# Altium PCB Robo_Sumo.PcbDoc
Units mm, origin at the board's own origin, x right, y up, seen from the top; angles counter-clockwise.
Board outline 99.9 x 99.96 mm, 2 copper layers (Top Layer, Bottom Layer); 38 components, 45 nets, 138 pads, 33 vias.
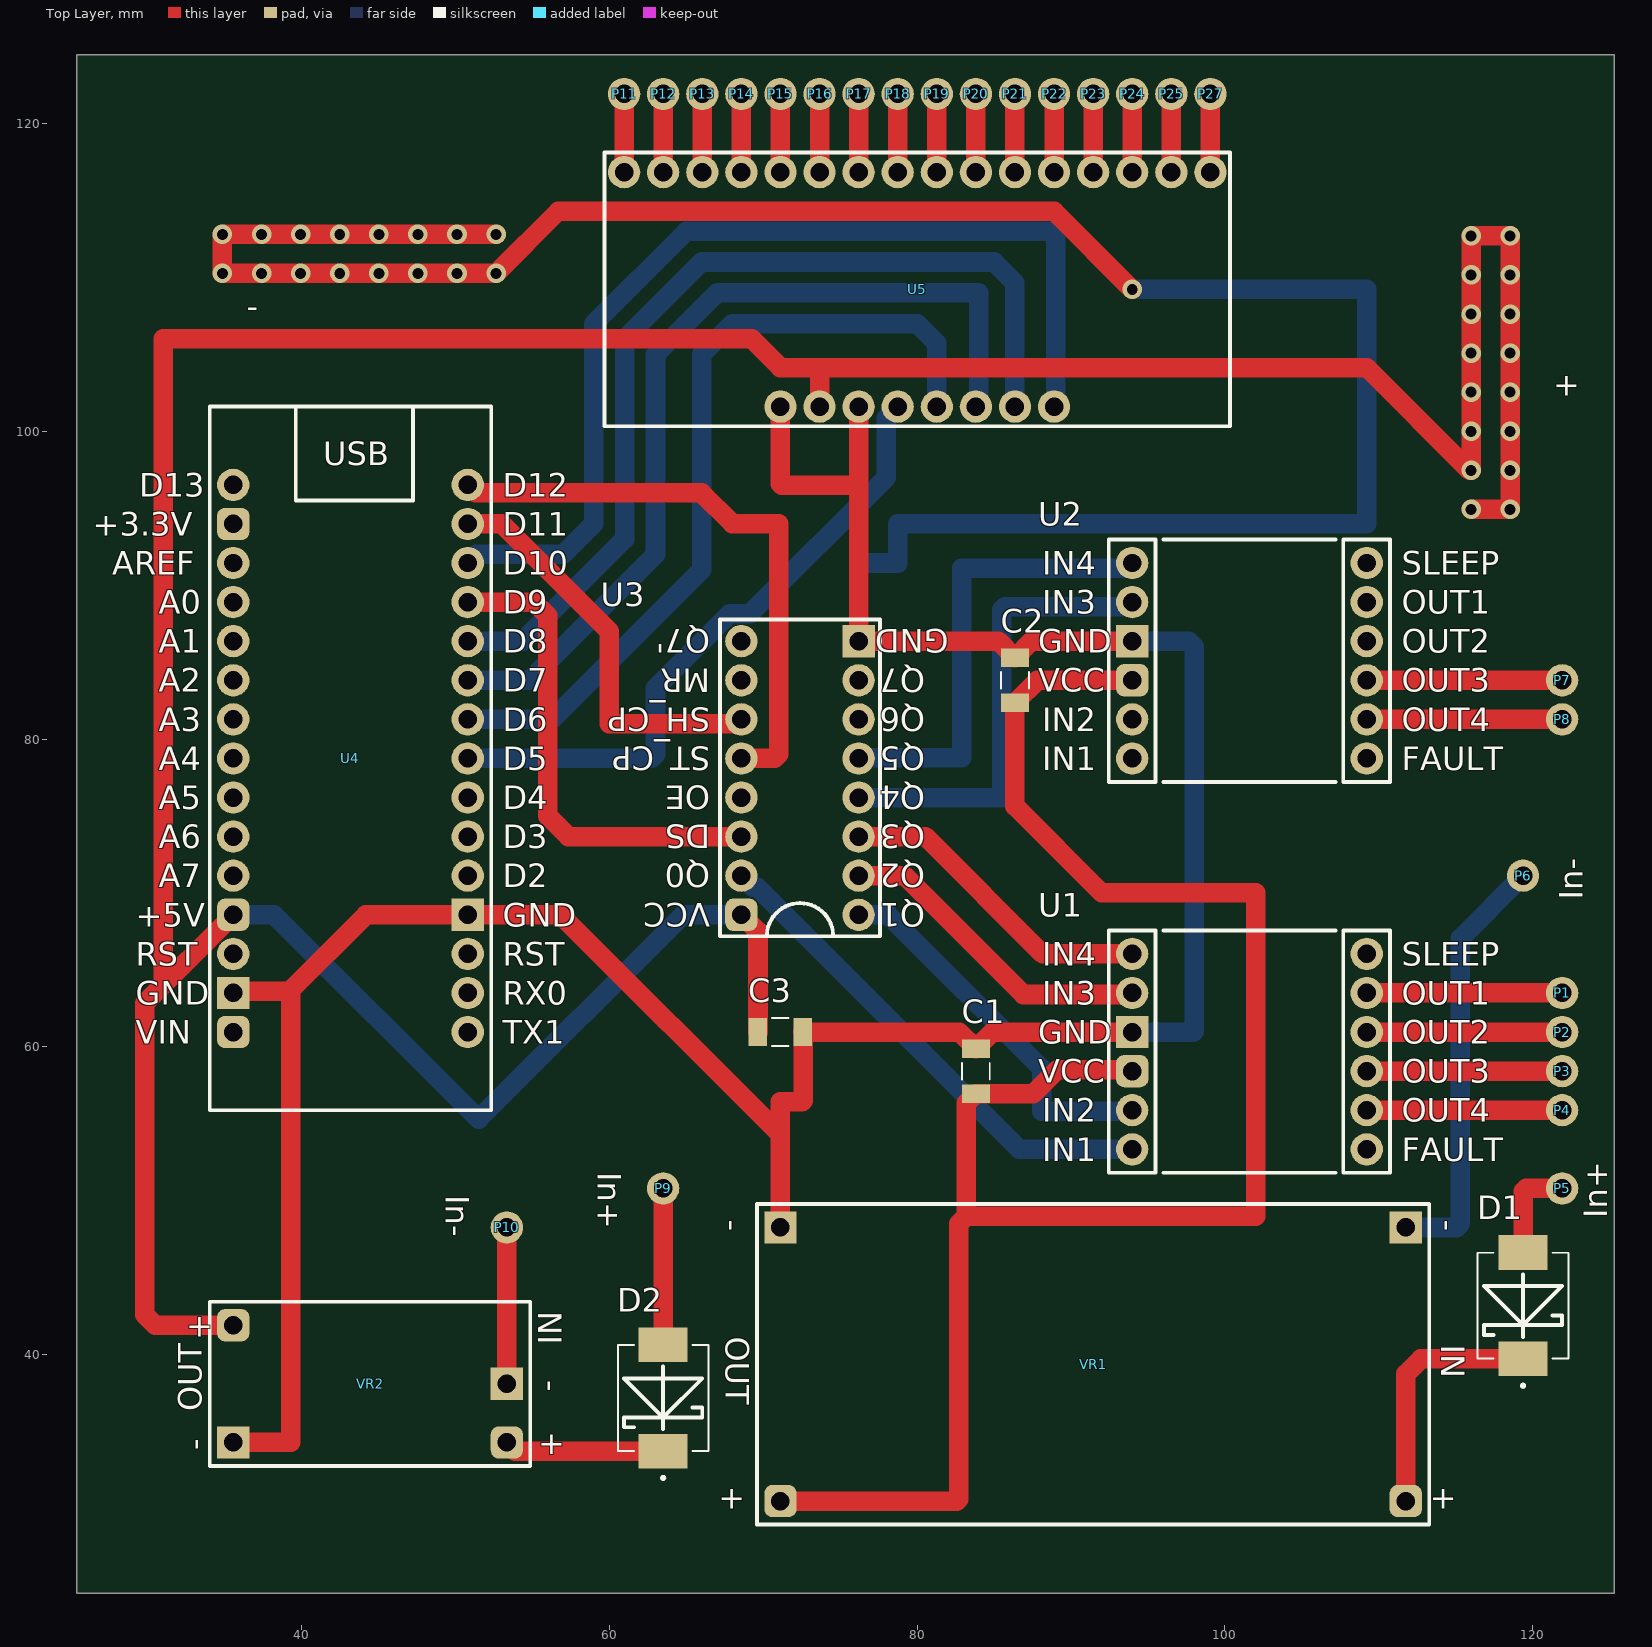
[diagram p0: Top Layer view]
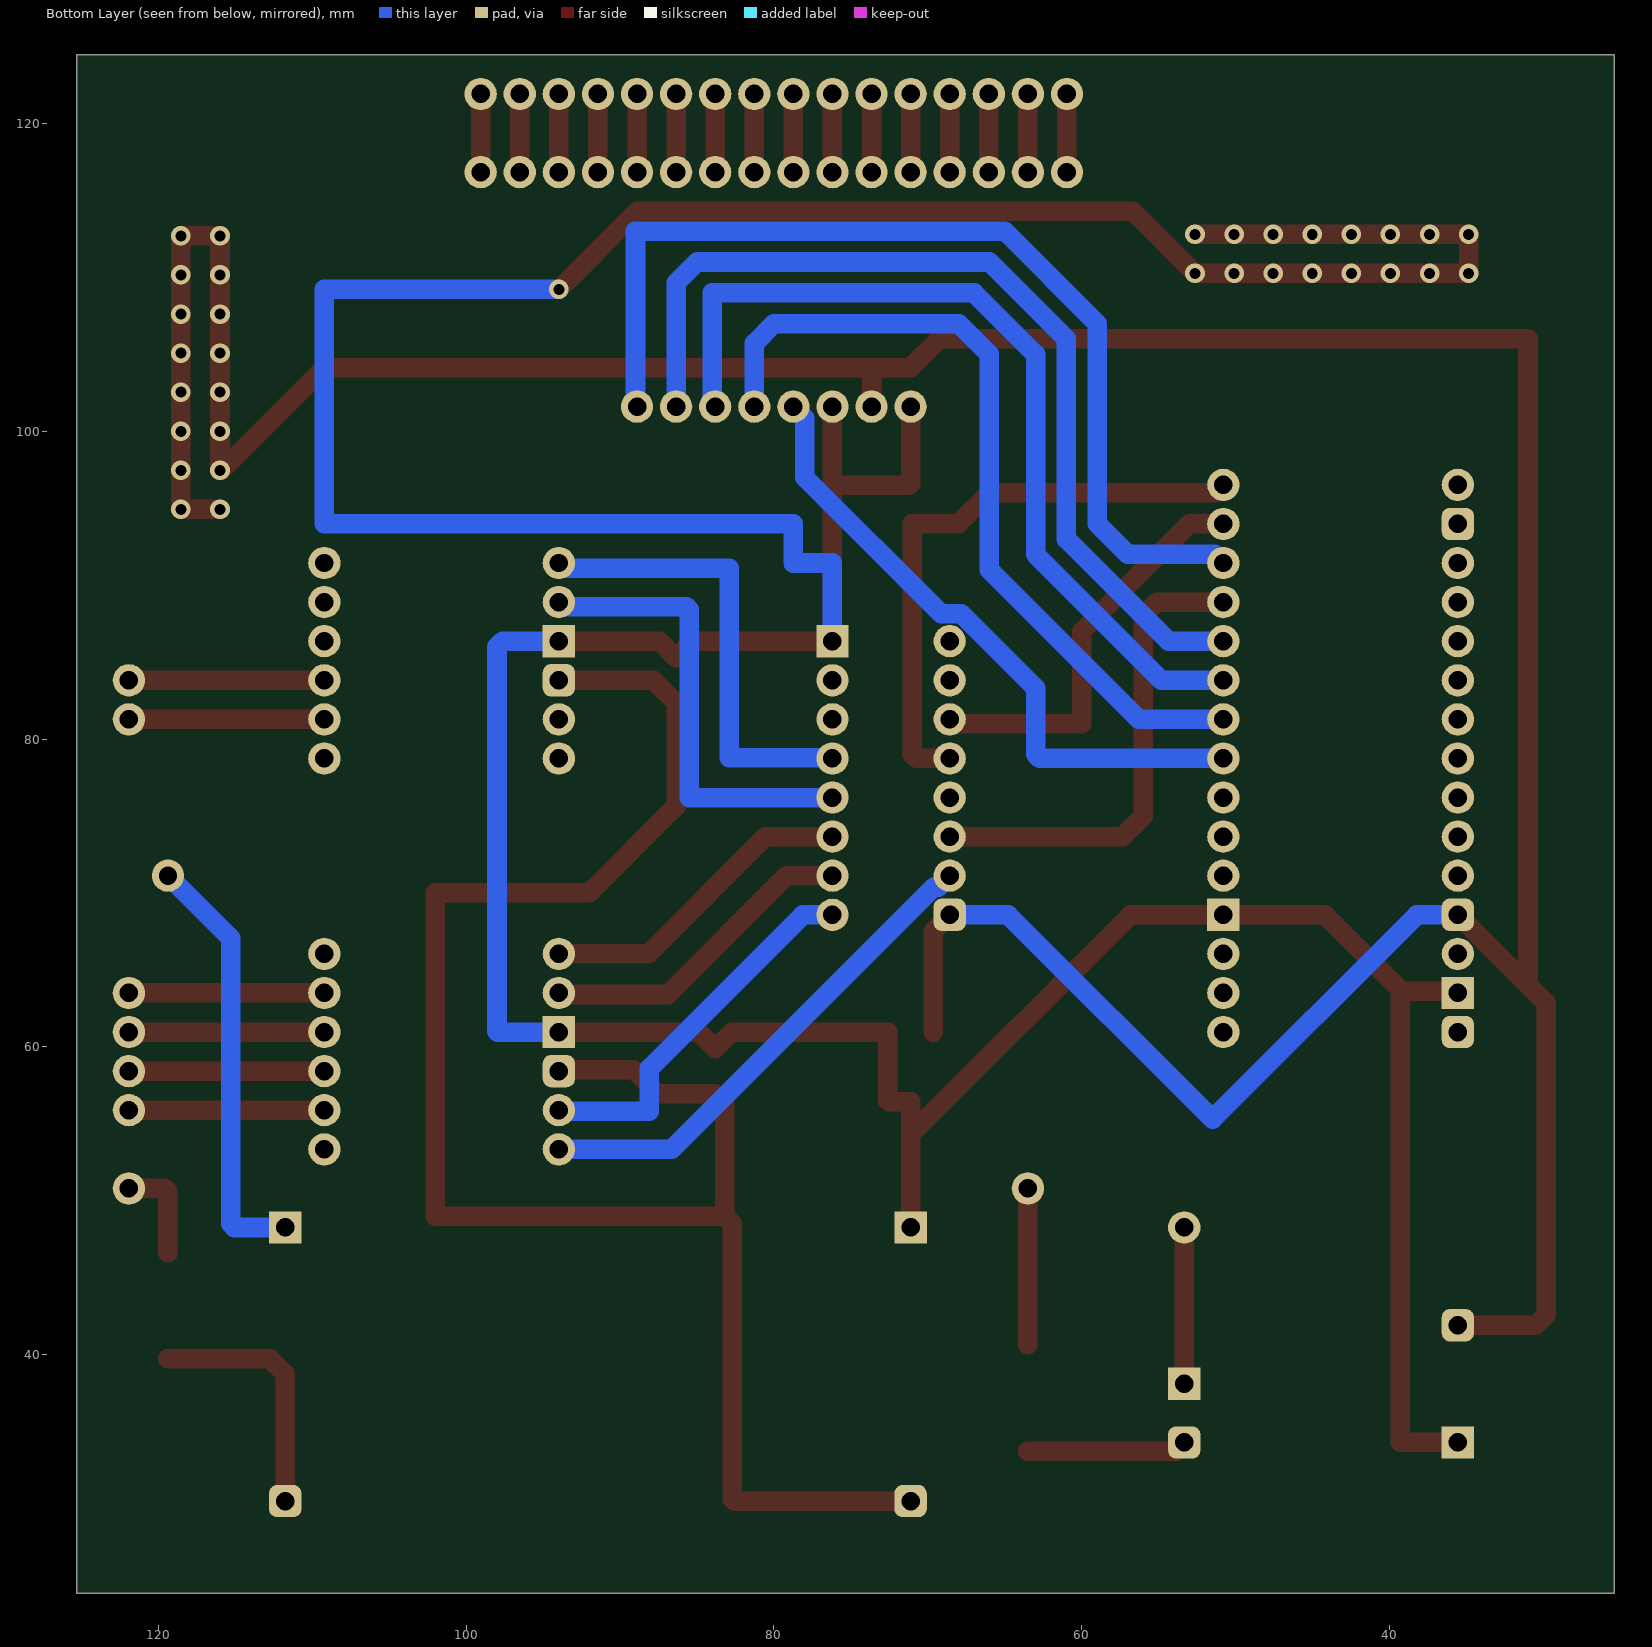
[diagram p1: Bottom Layer view, seen from below]

## Layer stack, top to bottom
Top Solder: solder mask 0.0102, Solder Resist, Dk 3.5
Top Layer: signal copper 0.0356
Dielectric 1: dielectric 0.32, FR-4, Dk 4.8
Bottom Layer: signal copper 0.0356
Bottom Solder: solder mask 0.0102, Solder Resist, Dk 3.5

## Board outline
25.4,24.5 125.3,24.5 125.3,124.46 25.4,124.46

## Design rules (kind name [scope] priority, off if disabled: settings)
AssemblyTestPointUsage [All] p1: isadvanced=TRUE
AssemblyTestpoint [All] p1: isadvanced=TRUE testpointundercomponent=TRUE minsize=1.016 maxsize=2.54 preferedsize=1.524 minholesize=0 maxholesize=1.016 preferedholesize=0.813 testpointgrid=0.025 usegrid=TRUE gridtolerance=0 allowsidetop=TRUE allowsidebottom=TRUE
Clearance Clearance_1 [OnMid vs OnMid] p1: gap=0.1 ignorepadtopadclearanceinfootprint=FALSE sourcerule=49 cellrowname=All cellrowtype=0 cellcolname=All cellcoltype=0 innerlayers=TRUE
Clearance Clearance_2 [(ExistsOnLayer('Top Layer') Or ExistsOnLayer('Bottom Layer')) vs (ExistsOnLayer('Top Layer') Or ExistsOnLayer('Bottom Layer'))] p2: gap=0.1 ignorepadtopadclearanceinfootprint=FALSE sourcerule=49 cellrowname=All cellrowtype=0 cellcolname=All cellcoltype=0 outerlayers=TRUE
Clearance [All] p3: gap=0.254 ignorepadtopadclearanceinfootprint=FALSE ismatrix=TRUE
ComponentClearance [All] p1: isadvanced=TRUE gap=0.254 collisioncheckmode=3 verticalgap=0.254 showdistances=FALSE
FabricationTestPointUsage [All] p1: isadvanced=TRUE valid=0 allowmultiple=FALSE
FabricationTestpoint [All] p1: isadvanced=TRUE side=3 testpointundercomponent=TRUE minsize=1.016 maxsize=2.54 preferedsize=1.524 minholesize=0 maxholesize=1.016 preferedholesize=0.813 testpointgrid=0.025 allowsidetop=TRUE allowsidebottom=TRUE usegrid=TRUE gridtolerance=0
FanoutControl Fanout_BGA [IsBGA] p1: isadvanced=TRUE bgadir=Out bgaviamode=Centered fanoutstyle=Auto fanoutdirection=Alternating viagrid=0.025 // Fanout_BGA (Default Rule)
FanoutControl Fanout_LCC [IsLCC] p2: isadvanced=TRUE bgadir=Out bgaviamode=Centered fanoutstyle=Auto fanoutdirection=Alternating viagrid=0.025 // Fanout_LCC (Default Rule)
FanoutControl Fanout_SOIC [IsSOIC] p3: isadvanced=TRUE bgadir=Out bgaviamode=Centered fanoutstyle=Auto fanoutdirection=Alternating viagrid=0.025 // Fanout_SOIC (Default Rule)
FanoutControl Fanout_Small [(CompPinCount < 5)] p4: isadvanced=TRUE bgadir=Out bgaviamode=Centered fanoutstyle=Auto fanoutdirection=OutThenIn viagrid=0.025 // Fanout_Small (Default Rule)
FanoutControl Fanout_Default [All] p5: isadvanced=TRUE bgadir=Out bgaviamode=Centered fanoutstyle=Auto fanoutdirection=Alternating viagrid=0.025 // Fanout_Default (Default Rule)
Height [All] p1: isadvanced=TRUE minheight=0 maxheight=25.4 prefheight=12.7
HoleSize [All] p1: isadvanced=TRUE absolutevalues=TRUE maxlimit=2.54 minlimit=0.025 maxpercent=80.000 minpercent=20.000
HoleToHoleClearance [All] p1: isadvanced=TRUE gap=0.254 allowstackedmicrovias=TRUE
LayerPairs [All] p1: isadvanced=TRUE enforce=TRUE
MinimumSolderMaskSliver [All] p1: isadvanced=TRUE minsoldermaskwidth=0.254
NetAntennae [All] p1: isadvanced=TRUE netantennaetolerance=0
PasteMaskExpansion [All] p1: isadvanced=TRUE expansion=0
PlaneClearance [All] p1: isadvanced=TRUE clearance=0.508
PlaneConnect [All] p1: isadvanced=TRUE planeconnectstyle=Relief reliefexpansion=0.508 reliefentries=4 reliefconductorwidth=0.254 reliefairgap=0.254
PolygonConnect [All] p1: connectstyle=Relief reliefconductorwidth=0.254 reliefentries=4 polygonreliefangle="90 Angle" airgapwidth=0.254
RoutingCorners [All] p1: isadvanced=TRUE cornerstyle=45-Degree minsetback=2.54 maxsetback=2.54
RoutingPriority [All] p1: isadvanced=TRUE routingpriority=0
RoutingVias [All] p1: holewidth=0.711 width=1.27 viastyle="Through Hole" minholewidth=0.711 minwidth=1.27 maxholewidth=0.711 maxwidth=1.27
ShortCircuit [All] p1: isadvanced=TRUE allowed=FALSE
SilkToSilkClearance [All] p1: isadvanced=TRUE silktosilkclearance=0.254
SilkToSolderMaskClearance [IsPad] p1: isadvanced=TRUE minsilkscreentomaskgap=0.254 clearancetoexposedcopper=TRUE
SolderMaskExpansion [All] p1: isadvanced=TRUE expansion=0.102 istentingtop=FALSE
SupplyNets "Schematic Supply Nets_11" [InNet('ST_CP')] p1: isadvanced=TRUE voltage=0.000
SupplyNets "Schematic Supply Nets_10" [InNet('Q4')] p2: isadvanced=TRUE voltage=0.000
SupplyNets "Schematic Supply Nets_9" [InNet('Q2')] p3: isadvanced=TRUE voltage=0.000
SupplyNets "Schematic Supply Nets_8" [InNet('+5')] p4: isadvanced=TRUE voltage=0.000
SupplyNets "Schematic Supply Nets_7" [InNet('+3V')] p5: isadvanced=TRUE voltage=0.000
SupplyNets "Schematic Supply Nets_6" [InNet('Q1')] p6: isadvanced=TRUE voltage=0.000
SupplyNets "Schematic Supply Nets_5" [InNet('Q3')] p7: isadvanced=TRUE voltage=0.000
SupplyNets "Schematic Supply Nets_4" [InNet('GND')] p8: isadvanced=TRUE voltage=0.000
SupplyNets "Schematic Supply Nets_3" [InNet('DS')] p9: isadvanced=TRUE voltage=0.000
SupplyNets "Schematic Supply Nets_2" [InNet('Q5')] p10: isadvanced=TRUE voltage=0.000
SupplyNets "Schematic Supply Nets_1" [InNet('SH_CP')] p11: isadvanced=TRUE voltage=0.000
SupplyNets "Schematic Supply Nets" [InNet('Q0')] p12: isadvanced=TRUE voltage=0.000
UnRoutedNet [All] p1: isadvanced=TRUE
UnpouredPolygon [All] p1: isadvanced=TRUE
Width MaxMinWidth_1 [All] p1: isadvanced=TRUE maxlimit=1.27 minlimit=0.254 preferedwidth=1.27 minimp=50.000000 maximp=50.000000 favimp=50.000000
Width [All] p2 off: maxlimit=0.254 minlimit=0.254 preferedwidth=0.254
4 further rules are at their usual default settings.

## Components (designator, comment, footprint, x,y, rotation, side; value= is the part's Value field where it differs from the comment)
C1 "100nF" CAPC3216X180N 83.82,58.42 r270 top
C2 "100nF" CAPC3216X180N 86.36,83.82 r90 top
C3 "100nF" CAPC3216X180N 71.12,60.96 r180 top
D1 "SS34" DIOM7959X265N 119.38,43.18 r90 top
D2 "SS34" DIOM7959X265N 63.5,37.185 r90 top
P1 "Q0" PCB_Pin_1 121.92,63.5 r0 top
P2 "Q1" PCB_Pin_1 121.92,60.96 r0 top
P3 "Q2" PCB_Pin_1 121.92,58.42 r0 top
P4 "Q3" PCB_Pin_1 121.92,55.88 r0 top
P5 "+16V" PCB_Pin_1 121.92,50.8 r0 top
P6 "GND" PCB_Pin_1 119.38,71.12 r0 top
P7 "Q4" PCB_Pin_1 121.92,83.82 r0 top
P8 "Q5" PCB_Pin_1 121.92,81.28 r0 top
P9 "+4V" PCB_Pin_1 63.5,50.8 r0 top
P10 "GND" PCB_Pin_1 53.34,48.26 r0 top
P11 "" PCB_Pin_1 60.96,121.92 r0 top
P12 "" PCB_Pin_1 63.5,121.92 r0 top
P13 "" PCB_Pin_1 66.04,121.92 r0 top
P14 "" PCB_Pin_1 68.58,121.92 r0 top
P15 "" PCB_Pin_1 71.12,121.92 r0 top
P16 "" PCB_Pin_1 73.66,121.92 r0 top
P17 "" PCB_Pin_1 76.2,121.92 r0 top
P18 "" PCB_Pin_1 78.74,121.92 r0 top
P19 "" PCB_Pin_1 81.28,121.92 r0 top
P20 "" PCB_Pin_1 83.82,121.92 r0 top
P21 "" PCB_Pin_1 86.36,121.92 r0 top
P22 "" PCB_Pin_1 88.9,121.92 r0 top
P23 "" PCB_Pin_1 91.44,121.92 r0 top
P24 "" PCB_Pin_1 93.98,121.92 r0 top
P25 "" PCB_Pin_1 96.52,121.92 r0 top
P27 "" PCB_Pin_1 99.06,121.92 r0 top
U1 "DRV8833" PCB_DRV8833 91.44,50.8 r0 top
U2 "DRV8833" PCB_DRV8833 91.44,76.2 r0 top
U3 "74HC595" PCB_74HC595_Footprint 78.74,88.9 r180 top
U4 "ATMega328p" PCB_ATMega328p 33.02,58.42 r0 top
U5 "CD74HC4067M" CD74HC4067M 80.01,109.22 r270 top
VR1 "LM2596" "DC-DC Step-Down Footprint" 114.3,50.8 r180 top
VR2 "SX1308" "DC-DC Step-Up Footprint" 33.02,31.75 r0 top

## Footprints (in the part's own frame and the unit in brackets; to place one, negate y for a bottom-side part, rotate by r counter-clockwise, add the part's x,y. Pads: shape width x height; smd on the part's side, far side on the other; paste and mask are expansions set on the pad)
CAPC3216X180N [mm]
  rect 1.2x1.82 smd: 1(-1.46,0) 2(1.46,0)
  silkscreen extent -0.54,-0.9 0.54,0.9, body extent -1.6,-0.8 1.6,0.8, height 1.8
CD74HC4067M [mm]
  round 2.1 hole 1.2: 1(7.62,8.89) 2(-7.62,-1.27) 3(-7.62,-3.81) 4(-7.62,-6.35) 5(-7.62,-8.89) 6(-7.62,-11.43) 7(-7.62,-13.97) 8(-7.62,-16.51) 9(-7.62,-19.05) 10(7.62,-1.27) 11(7.62,1.27) 12(7.62,-8.89) 13(7.62,6.35) 14(7.62,3.81) 15(7.62,-3.81) 16(-7.62,19.05) 17(-7.62,16.51) 18(-7.62,13.97) 19(-7.62,11.43) 20(-7.62,8.89) 21(-7.62,6.35) 22(-7.62,3.81) 23(-7.62,1.27) 24(7.62,-6.35)
  silkscreen extent -8.89,-20.32 8.89,20.32
"DC-DC Step-Down Footprint" [mm]
  rect 2.1x2.1 hole 1.2: 0(2.54,2.54) 3(43.18,2.54)
  rrect50% 2.1x2.1 hole 1.2: 1(2.54,20.32) 2(43.18,20.32)
  silkscreen extent 1.02,1.02 44.7,21.84
"DC-DC Step-Up Footprint" [mm]
  rect 2.1x2.1 hole 1.2: 0(2.54,2.54) 2(20.32,6.35)
  rrect50% 2.1x2.1 hole 1.2: 1(2.54,10.16) 3(20.32,2.54)
  silkscreen extent 1.02,1.02 21.84,11.68
DIOM7959X265N [mm]
  rect 2.25x3.18 smd: A(3.455,0) C(-3.455,0)
  silkscreen extent -5.3,-2.95 3.44,2.95, body extent -3.98,-2.95 3.98,2.95, height 2.65
PCB_74HC595_Footprint [mm]
  rect 2.1x2.1 hole 1.2: 0(2.54,2.54)
  round 2.1 hole 1.2: 1(2.54,5.08) 2(2.54,7.62) 3(2.54,10.16) 4(2.54,12.7) 5(2.54,15.24) 6(2.54,17.78) 7(2.54,20.32) 9(10.16,17.78) 10(10.16,15.24) 11(10.16,12.7) 12(10.16,10.16) 13(10.16,7.62) 14(10.16,5.08) 15(10.16,2.54)
  rrect50% 2.1x2.1 hole 1.2: 8(10.16,20.32)
  silkscreen extent 1.14,1.14 11.56,21.72
PCB_ATMega328p [mm] "Arduino Nano"
  rrect50% 2.1x2.1 hole 1.2: 0(2.54,2.54) 3(2.54,10.16) 13(2.54,35.56)
  rect 2.1x2.1 hole 1.2: 1(2.54,5.08) 26(17.78,10.16)
  round 2.1 hole 1.2: 2(2.54,7.62) 4(2.54,12.7) 5(2.54,15.24) 6(2.54,17.78) 7(2.54,20.32) 8(2.54,22.86) 9(2.54,25.4) 10(2.54,27.94) 11(2.54,30.48) 12(2.54,33.02) 14(2.54,38.1) 15(17.78,38.1) 16(17.78,35.56) 17(17.78,33.02) 18(17.78,30.48) 19(17.78,27.94) 20(17.78,25.4) 21(17.78,22.86) 22(17.78,20.32) 23(17.78,17.78) 24(17.78,15.24) 25(17.78,12.7) 27(17.78,7.62) 28(17.78,5.08) 29(17.78,2.54)
  silkscreen extent 1.02,-2.54 19.3,43.18
PCB_DRV8833 [mm]
  round 2.1 hole 1.2: 0(2.54,2.54) 1(2.54,5.08) 4(2.54,12.7) 5(2.54,15.24) 6(17.78,15.24) 7(17.78,12.7) 8(17.78,10.16) 9(17.78,7.62) 10(17.78,5.08) 11(17.78,2.54)
  rrect50% 2.1x2.1 hole 1.2: 2(2.54,7.62)
  rect 2.1x2.1 hole 1.2: 3(2.54,10.16)
  silkscreen extent 1.02,1.02 19.3,16.76
PCB_Pin_1 [mm]
  round 2.1 hole 1.2: 0(0,0)
  body extent -1,-1 1,1, height 4.55

## Part data
C1 C2 C3: library part C_1206_100nF, "Ceramic capacitor SMD 1206 100 nF 50 V 10 % Samsung Electro-Mechanics CL31B104KBCNNNC 4000 pc(s)", Package="1206 Samsung", Availability="In Stock", Check_prices=https://www.snapeda.com/parts/CL31B104KBCNNNC/Samsung+Electro-Mechanics/view-part/?ref=eda, MF="Samsung Electro-Mechanics", MP=CL31B104KBCNNNC, Price=None, Purchase-URL=https://pricing.snapeda.com/search/part/CL31B104KBCNNNC/?ref=eda, SnapEDA_Link=https://www.snapeda.com/parts/CL31B104KBCNNNC/Samsung+Electro-Mechanics/view-part/?ref=snap
D1 D2: library part Diode_SS34, "SS34 - діод Шоттки", Package="SMC-2 ON Semiconductor", Check_prices=https://www.snapeda.com/parts/SS34/Onsemi/view-part/?ref=eda, MF=onsemi, MP=SS34, SnapEDA_Link=https://www.snapeda.com/parts/SS34/Onsemi/view-part/?ref=snap
P1 P2 P3 P4 P5 P6 P7 P8 P9 P10 P11 P12 P13 P14 P15 P16 P17 P18 P19 P20 P21 P22 P23 P24 P25 P27: library part PIN_1
U1 U2: library part "Motor Driver", "Драйвер крокового/колекторних двигунів DRV8833"
U3: library part SCS-16, "SN74HC595N - вихідний зсувний регістр 74HC595"
U4: library part "Arduino Nano", "DCCduino Nano CH340 - аналог Arduino Nano v3.0 TYPE C"
U5: "5-V, 16:1, 1-channel analog multiplexer", Package=None, Availability=Unavailable, MP=CD74HC4067M, Price=None
VR1: library part "DC-DC Step-Down", "DC-DC конвертер знижуючий 4.5...40В на 1.5...35В на LM2596"
VR2: library part "DC-DC Step-Up", "Mini DC-DC конвертер підвищує 2.5..10В 5В/8В/9В/12В на SX1308"

## Via types
v1: diameter 1.27, hole 0.711, Top Layer to Bottom Layer, 33 vias

## Nets (pads, with @x,y where several pads share a name; then routed paths per layer and width w, separated by ;. In a path a pad name is that pad's centre, name@x,y a point inside that pad or via, vN(x,y) a via of type N, cw(c..) or ccw(c..) an arc to the next point about the centre after c; other vN are vias at no path point)
+3V: C1.2 C2.1 U1.2 U2.2 VR1.2 | length 122
  Top Layer w1.27: VR1.2 82.58,30.48 82.7,30.6 82.7,48.5 83.2,49 ; U1.2 93.9,58.5 89.1,58.5 87.56,56.96 C1.2 83.2,56.34 83.2,49 ; U2.2 87.82,83.82 C2.1 86.36,75.64 92,70 102,70 102,49 83.2,49
+5: C3.2 U3.8 U4.3 U5.24 VR2.1 | length 257.7
  Top Layer w1.27: 31,64.02 31,106 69.26,106 71.12,104.14 73.66,104.14 ; VR2.1 30.49,41.91 29.8,42.6 29.8,62.82 U4.3 ; U3.8 69.66,67.5 C3.2 ; U5.24 73.66,104.14 ; v1(116,94.92) v1(118.54,94.92) v1(118.54,112.7) v1(116,112.7) v1(116,97.46) 115.9,97.46 109.22,104.14 73.66,104.14
  Bottom Layer w1.27: U4.3 38.22,68.58 51.5,55.3 64.78,68.58 U3.8
  other v1: 118.54,97.46 116,100 118.54,100 116,102.54 118.54,102.54 116,105.08 118.54,105.08 116,107.62 118.54,107.62 116,110.16 118.54,110.16
DS: U3.10 U4.18 | length 31.7
  Top Layer w1.27: U4.18 55.1,88.9 56,88 56,75 57.34,73.66 U3.10
GND: C1.1 C2.2 C3.1 U1.3 U2.3 U3.0 U4.1 U4.26 U5.12 U5.15 VR1.3 VR2.0 | length 344.7
  Top Layer w1.27: VR2.0 39.29,34.29 39.3,34.3 39.3,63.5 39.2,63.6 ; U4.1 35.66,63.6 39.2,63.6 ; v1(52.64,112.8) v1(34.86,112.8) v1(34.86,110.26) v1(52.64,110.26) 56.68,114.3 88.9,114.3 v1(93.98,109.22) ; VR1.3 71.12,54.3 ; U5.12 71.12,96.58 71.2,96.5 76.2,96.5 ; C3.1 82.74,60.96 C1.1 84.9,60.96 U1.3 ; C3.1@72.6,60.94 72.6,56.5 72.52,56.42 71.12,56.42 71.12,54.3 ; U5.15 76.2,96.5 ; U2.3 87.44,86.36 C2.2 85.28,86.36 U3.0 76.2,96.5 ; 39.2,63.6 44.18,68.58 U4.26 56.84,68.58 71.12,54.3
  Bottom Layer w1.27: U3.0 76.2,91.44 78.74,91.44 78.74,93.98 109.22,93.98 109.22,109.22 v1(93.98,109.22) ; U1.3 97.96,60.96 98,61 98,86 97.64,86.36 U2.3
  other v1: 37.4,110.26 39.94,110.26 42.48,110.26 45.02,110.26 47.56,110.26 50.1,110.26 37.4,112.8 39.94,112.8 42.48,112.8 45.02,112.8 47.56,112.8 50.1,112.8
GND_4V: P10.0 VR2.2 | length 10.2
  Top Layer w1.27: VR2.2 P10.0
GND_16V: P6.0 VR1.0 | length 27.9
  Bottom Layer w1.27: VR1.0 115.06,48.26 115.3,48.5 115.3,67.04 P6.0
NetP1_0: P1.0 U1.7 | length 12.7
  Top Layer w1.27: U1.7 P1.0
NetP2_0: P2.0 U1.8 | length 12.7
  Top Layer w1.27: U1.8 P2.0
NetP3_0: P3.0 U1.9 | length 12.7
  Top Layer w1.27: U1.9 P3.0
NetP4_0: P4.0 U1.10 | length 12.7
  Top Layer w1.27: U1.10 P4.0
NetP7_0: P7.0 U2.9 | length 12.7
  Top Layer w1.27: U2.9 P7.0
NetP8_0: P8.0 U2.10 | length 12.7
  Top Layer w1.27: U2.10 P8.0
NetP11_0: P11.0 U5.9 | length 5.1
  Top Layer w1.27: U5.9 P11.0
NetP12_0: P12.0 U5.8 | length 5.1
  Top Layer w1.27: U5.8 P12.0
NetP13_0: P13.0 U5.7 | length 5.1
  Top Layer w1.27: U5.7 P13.0
NetP14_0: P14.0 U5.6 | length 5.1
  Top Layer w1.27: U5.6 P14.0
NetP15_0: P15.0 U5.5 | length 5.1
  Top Layer w1.27: U5.5 P15.0
NetP16_0: P16.0 U5.4 | length 5.1
  Top Layer w1.27: U5.4 P16.0
NetP17_0: P17.0 U5.3 | length 5.1
  Top Layer w1.27: U5.3 P17.0
NetP18_0: P18.0 U5.2 | length 5.4
  Top Layer w1.27: U5.2 P18.0 78.92,121.92 P18.0@79,122
NetP19_0: P19.0 U5.23 | length 5.1
  Top Layer w1.27: U5.23 P19.0
NetP20_0: P20.0 U5.22 | length 5.1
  Top Layer w1.27: U5.22 P20.0
NetP21_0: P21.0 U5.21 | length 5.1
  Top Layer w1.27: U5.21 P21.0
NetP22_0: P22.0 U5.20 | length 5.1
  Top Layer w1.27: U5.20 P22.0
NetP23_0: P23.0 U5.19 | length 5.1
  Top Layer w1.27: U5.19 P23.0
NetP24_0: P24.0 U5.18 | length 5.1
  Top Layer w1.27: U5.18 P24.0
NetP25_0: P25.0 U5.17 | length 5.1
  Top Layer w1.27: U5.17 P25.0
NetP27_0: P27.0 U5.16 | length 5.1
  Top Layer w1.27: U5.16 P27.0
NetU4_17: U4.17 U5.1 | length 66.2
  Bottom Layer w1.27: U4.17 51.36,92 57,92 59,94 59,107 65,113 89,113 89,101.7 U5.1
NetU4_19: U4.19 U5.13 | length 62
  Bottom Layer w1.27: U4.19 54.36,86.36 61,93 61,106 66,111 85,111 86.36,109.64 U5.13
NetU4_20: U4.20 U5.14 | length 58.7
  Bottom Layer w1.27: U4.20 54.82,83.82 63,92 63,105 67,109 84,109 84,101.78 U5.14
NetU4_21: U4.21 U5.11 | length 54
  Bottom Layer w1.27: U4.21 56.28,81.28 66,91 66,105 68,107 80,107 81.28,105.72 U5.11
NetU4_22: U4.22 U5.10 | length 42.2
  Bottom Layer w1.27: U4.22 62.74,78.74 63,79 63,83.304 67.841,88.145 69.145,88.145 78,97 78,100.86 U5.10
Q0: U1.0 U3.9 | length 32.8
  Bottom Layer w1.27: U3.9 69.335,70.365 69.627,70.365 86.652,53.34 U1.0
Q1: U1.1 U3.7 | length 24.7
  Bottom Layer w1.27: U3.7 78.12,68.58 88.1,58.6 88.1,55.8 93.9,55.8 U1.1
Q2: U1.4 U3.6 | length 21
  Top Layer w1.27: U3.6 79.18,71.12 86.9,63.4 93.88,63.4 U1.4
Q3: U1.5 U3.5 | length 20.9
  Top Layer w1.27: U3.5 80.54,73.66 88.16,66.04 U1.5
Q4: U2.4 U3.4 | length 30.2
  Bottom Layer w1.27: U3.4 85.5,76.2 85.5,88.4 85.7,88.6 93.68,88.6 U2.4
Q5: U2.5 U3.3 | length 30.2
  Bottom Layer w1.27: U3.3 76.26,78.8 82.9,78.8 82.9,91.1 93.64,91.1 U2.5
SH_CP: U3.13 U4.16 | length 26.8
  Top Layer w1.27: U4.16 53.02,93.98 60,87 60,81 68.3,81 U3.13
SS34_4V: D2.C VR2.3 | length 10.4
  Top Layer w1.27: VR2.3 53.9,33.73 D2.C
SS34_16V: D1.C VR1.1 | length 16.7
  Top Layer w1.27: VR1.1@112.04,30.2 VR1.1 111.76,38.741 112.744,39.725 D1.C
ST_CP: U3.12 U4.15 | length 38.8
  Top Layer w1.27: U4.15 51.32,96 66,96 68,94 71,94 71,79 70.74,78.74 U3.12
VCC_4V: D2.A P9.0 | length 10.2
  Top Layer w1.27: D2.A P9.0
VCC_16V: D1.A P5.0 | length 6.6
  Top Layer w1.27: D1.A 119.4,46.655 119.4,50.6 119.6,50.8 P5.0
pads on no net: U1.6 U1.11 U2.0 U2.1 U2.6 U2.7 U2.8 U2.11 U3.1 U3.2 U3.11 U3.14 U3.15 U4.0 U4.2 U4.4 U4.5 U4.6 U4.7 U4.8 U4.9 U4.10 U4.11 U4.12 U4.13 U4.14 U4.23 U4.24 U4.25 U4.27 U4.28 U4.29

## Silkscreen, mask and mechanical layers (free items; w line width, h text height)
Top Overlay:
  text "-" at 36.454,107.392 h1.52
  text "+" at 121.354,102.3 h1.52
  text "In-" at 123.246,69.554 h1.52 r90
  text "In+" at 59.254,51.846 h1.52 r270
  text "In-" at 49.354,50.346 h1.52 r270
  text "In+" at 124.846,48.854 h1.52 r90

## Text inside footprints (layer, text, board x,y; h text height)
U1: Top Overlay "OUT1" at 111.506,62.738 h1.52; Top Overlay "IN1" at 88.138,52.578 h1.52; Top Overlay "IN2" at 88.138,55.118 h1.52; Top Overlay "VCC" at 87.884,57.658 h1.52; Top Overlay "GND" at 87.884,60.198 h1.52; Top Overlay "IN3" at 88.138,62.738 h1.52; Top Overlay "IN4" at 88.138,65.278 h1.52; Top Overlay "SLEEP" at 111.506,65.278 h1.52; Top Overlay "OUT2" at 111.506,60.198 h1.52; Top Overlay "OUT3" at 111.506,57.658 h1.52; Top Overlay "OUT4" at 111.506,55.118 h1.52; Top Overlay "FAULT" at 111.506,52.578 h1.52
U2: Top Overlay "IN1" at 88.138,77.978 h1.52; Top Overlay "IN2" at 88.138,80.518 h1.52; Top Overlay "VCC" at 87.884,83.058 h1.52; Top Overlay "GND" at 87.884,85.598 h1.52; Top Overlay "IN3" at 88.138,88.138 h1.52; Top Overlay "IN4" at 88.138,90.678 h1.52; Top Overlay "SLEEP" at 111.506,90.678 h1.52; Top Overlay "OUT1" at 111.506,88.138 h1.52; Top Overlay "OUT2" at 111.506,85.598 h1.52; Top Overlay "OUT3" at 111.506,83.058 h1.52; Top Overlay "OUT4" at 111.506,80.518 h1.52; Top Overlay "FAULT" at 111.506,77.978 h1.52
U3: Top Overlay "Q7'" at 66.548,87.122 h1.52 r180; Top Overlay "MR" at 66.548,84.582 h1.52 r180; Top Overlay "SH_CP" at 66.548,82.042 h1.52 r180; Top Overlay "ST_CP" at 66.548,79.502 h1.52 r180; Top Overlay "OE" at 66.548,76.962 h1.52 r180; Top Overlay "DS" at 66.548,74.422 h1.52 r180; Top Overlay "Q0" at 66.548,71.882 h1.52 r180; Top Overlay "VCC" at 66.548,69.342 h1.52 r180; Top Overlay "GND" at 82.042,87.122 h1.52 r180; Top Overlay "Q7" at 80.518,84.582 h1.52 r180; Top Overlay "Q6" at 80.518,82.042 h1.52 r180; Top Overlay "Q5" at 80.518,79.502 h1.52 r180; Top Overlay "Q4" at 80.518,76.962 h1.52 r180; Top Overlay "Q3" at 80.518,74.422 h1.52 r180; Top Overlay "Q2" at 80.518,71.882 h1.52 r180; Top Overlay "Q1" at 80.518,69.342 h1.52 r180
U4: Top Overlay "D13" at 29.464,95.758 h1.52; Top Overlay "+3.3V" at 26.416,93.218 h1.52; Top Overlay "AREF" at 27.686,90.678 h1.52; Top Overlay "A0" at 30.734,88.138 h1.52; Top Overlay "A1" at 30.734,85.598 h1.52; Top Overlay "A2" at 30.734,83.058 h1.52; Top Overlay "A3" at 30.734,80.518 h1.52; Top Overlay "A4" at 30.734,77.978 h1.52; Top Overlay "A5" at 30.734,75.438 h1.52; Top Overlay "A6" at 30.734,72.898 h1.52; Top Overlay "A7" at 30.734,70.358 h1.52; Top Overlay "+5V" at 29.21,67.818 h1.52; Top Overlay "RST" at 29.21,65.278 h1.52; Top Overlay "GND" at 29.21,62.738 h1.52; Top Overlay "VIN" at 29.21,60.198 h1.52; Top Overlay "D12" at 53.086,95.758 h1.52; Top Overlay "D11" at 53.086,93.218 h1.52; Top Overlay "D10" at 53.086,90.678 h1.52; Top Overlay "D9" at 53.086,88.138 h1.52; Top Overlay "D8" at 53.086,85.598 h1.52; Top Overlay "D7" at 53.086,83.058 h1.52; Top Overlay "D6" at 53.086,80.518 h1.52; Top Overlay "D5" at 53.086,77.978 h1.52; Top Overlay "D4" at 53.086,75.438 h1.52; Top Overlay "D3" at 53.086,72.898 h1.52; Top Overlay "D2" at 53.086,70.358 h1.52; Top Overlay "GND" at 53.086,67.818 h1.52; Top Overlay "RST" at 53.086,65.278 h1.52; Top Overlay "RX0" at 53.086,62.738 h1.52; Top Overlay "TX1" at 53.086,60.198 h1.52; Top Overlay "USB" at 41.402,97.79 h1.52
VR1: Top Overlay "+" at 115.062,31.242 h1.52 r180; Top Overlay "-" at 113.792,48.768 h1.52 r270; Top Overlay "-" at 67.31,48.768 h1.52 r270; Top Overlay "+" at 68.834,31.242 h1.52 r180; Top Overlay "IN" at 114.046,40.64 h1.52 r270; Top Overlay "OUT" at 67.564,41.148 h1.52 r270
VR2: Top Overlay "OUT" at 33.528,36.322 h1.52 r90; Top Overlay "+" at 32.512,41.148 h1.52; Top Overlay "-" at 33.782,33.782 h1.52 r90; Top Overlay "IN" at 56.896,40.64 h1.52 r90; Top Overlay "-" at 56.642,37.592 h1.52 r90; Top Overlay "+" at 55.372,33.528 h1.52